# Altium PCB ICNE2521+ICL9101 EVM.PCBDOC
Units mm, origin at the board's own origin, x right, y up, seen from the top; angles counter-clockwise.
Board outline 181.66 x 131.8 mm, 2 copper layers (Top Layer, Bottom Layer); 46 components, 43 nets, 107 pads, 0 vias.
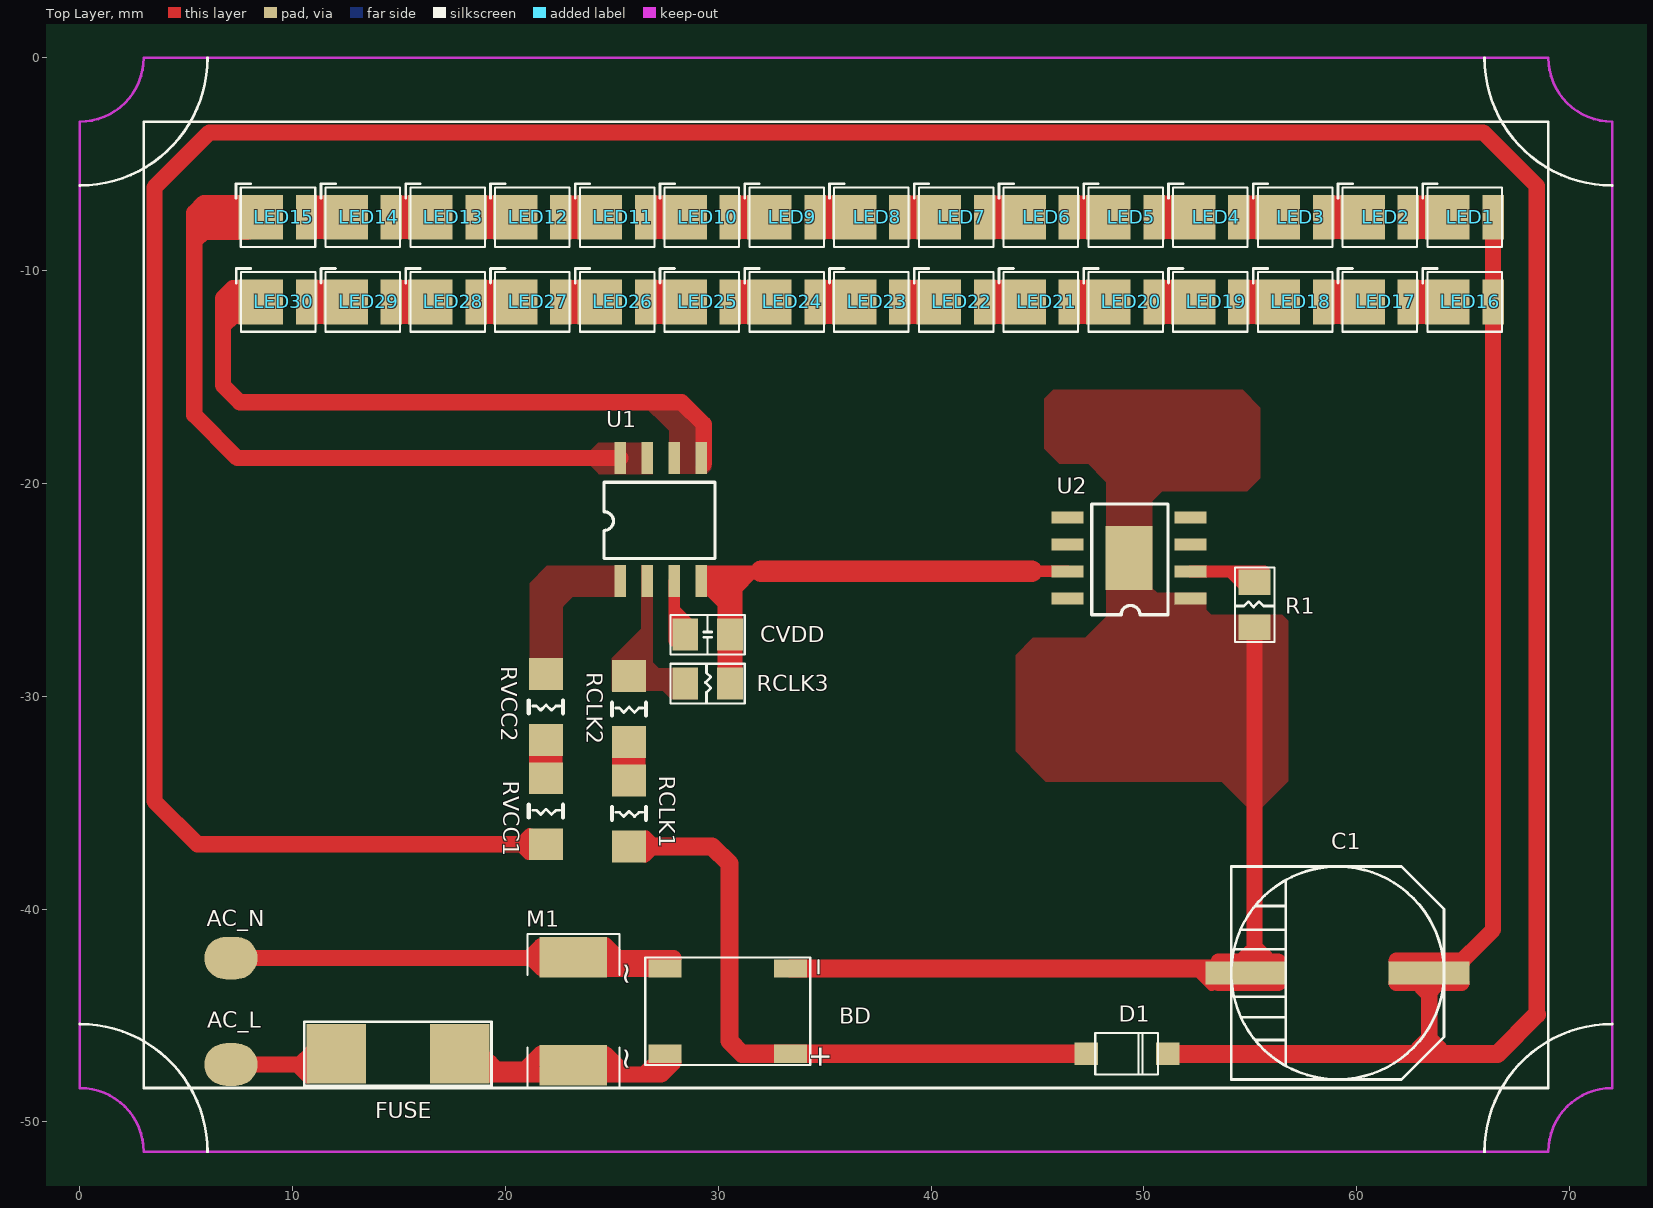
[diagram p0: Top Layer view]
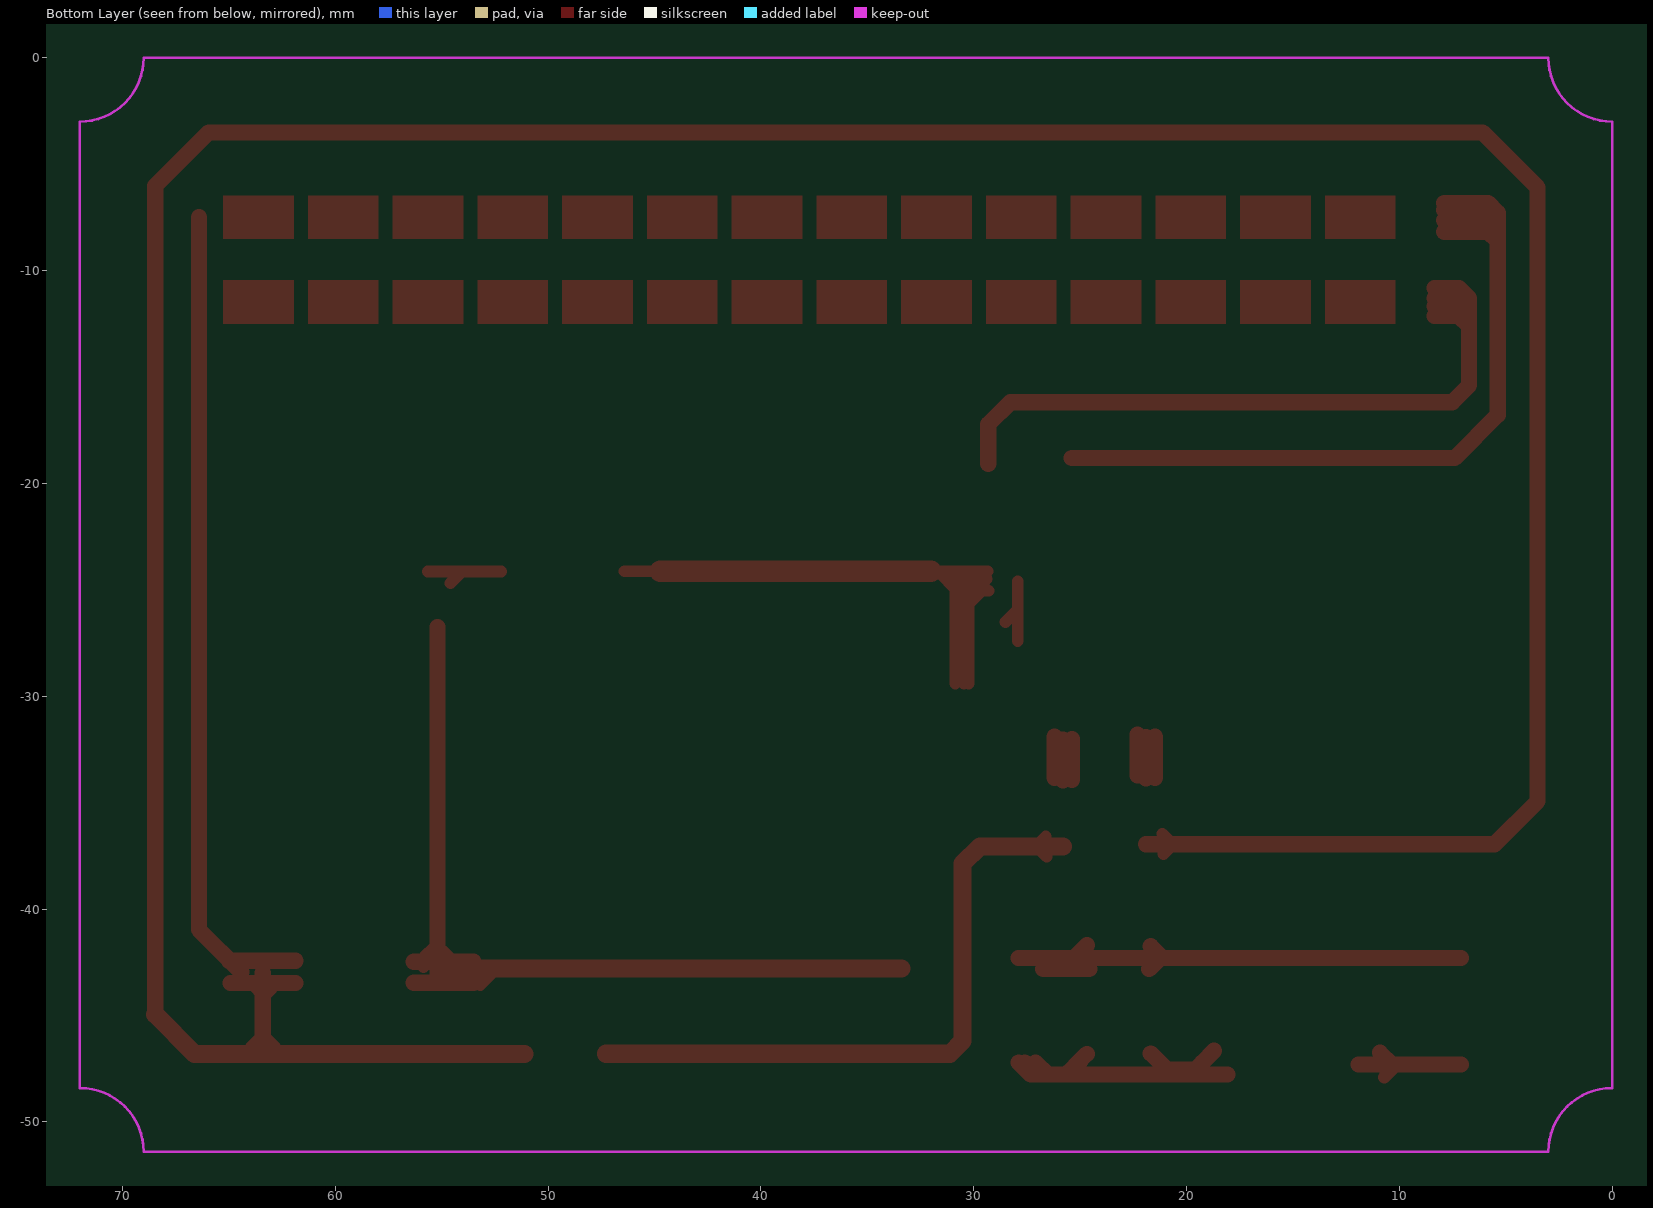
[diagram p1: Bottom Layer view, seen from below]

## Layer stack, top to bottom
Top Solder: solder mask 0.0102, Solder Resist, Dk 3.5
Top Layer: signal copper 0.0356
Dielectric1: dielectric 0.32, FR-4, Dk 4.8
Bottom Layer: signal copper 0.0356
Bottom Solder: solder mask 0.0102, Solder Resist, Dk 3.5

## Board outline
-38.678,19.684 138.792,19.684 138.792,-112.117 -42.869,-112.117 -42.869,19.684

## Design rules (kind name [scope] priority, off if disabled: settings)
Clearance [All] p1: gap=0.203
ComponentClearance [All] p1: gap=0.025 collisioncheckmode=3 verticalgap=0.254 showdistances=FALSE
FabricationTestPointUsage TestPointUsage [All] p1: valid=0 allowmultiple=FALSE
FabricationTestpoint Testpoint [All] p1: side=3 testpointundercomponent=TRUE minsize=1.016 maxsize=2.54 preferedsize=1.524 minholesize=0 maxholesize=1.016 preferedholesize=0.813 testpointgrid=0.025 allowsidetop=TRUE allowsidebottom=TRUE usegrid=TRUE gridtolerance=0
PlaneClearance [All] p1: clearance=0.102
PlaneConnect [All] p1: planeconnectstyle=Direct reliefexpansion=0.508 reliefentries=4 reliefconductorwidth=0.254 reliefairgap=0.254
PolygonConnect [All] p1: connectstyle=Direct reliefconductorwidth=0.254 reliefentries=4 polygonreliefangle="90 Angle" airgapwidth=0.254
RoutingVias [All] p1: holewidth=0.711 width=1.27 viastyle="Through Hole" minholewidth=0.711 minwidth=1.27 maxholewidth=0.711 maxwidth=1.27
SolderMaskExpansion [All] p1: expansion=0.102
Width [All] p1: maxlimit=25.4 minlimit=0.127 preferedwidth=1.524 toplayer_prefwidth=1 minimp=50.000000 maximp=50.000000 favimp=50.000000
25 further rules are at their usual default settings.

## Components (designator, comment, footprint, x,y, rotation, side; value= is the part's Value field where it differs from the comment)
AC_L "" "Test PAD 2" 7.1,-47.3 r180 top
AC_N "" "Test PAD 2" 7.1,-42.3 r0 top
BD "BD" BD-MDB10S 30.444,-44.796 r0 top
C1 "Cap Pol1" "10mmx10mm SMD CAP" 59.1,-43 r180 top
CVDD "Cap Semi" "C 0805" 29.5,-27.1 r180 top
D1 "Diode" SOD-123 49.2,-46.8 r180 top
FUSE "Fuse 2" "Fuse mf2410" 14.944,-46.796 r180 top
LED1 "" "2835 LED -everlight" 65.066,-7.489 r180 top
LED2 "" "2835 LED -everlight" 61.084,-7.489 r180 top
LED3 "" "2835 LED -everlight" 57.102,-7.489 r180 top
LED4 "" "2835 LED -everlight" 53.12,-7.489 r180 top
LED5 "" "2835 LED -everlight" 49.138,-7.489 r180 top
LED6 "" "2835 LED -everlight" 45.156,-7.489 r180 top
LED7 "" "2835 LED -everlight" 41.174,-7.489 r180 top
LED8 "" "2835 LED -everlight" 37.192,-7.489 r180 top
LED9 "" "2835 LED -everlight" 33.21,-7.489 r180 top
LED10 "" "2835 LED -everlight" 29.228,-7.489 r180 top
LED11 "" "2835 LED -everlight" 25.246,-7.489 r180 top
LED12 "" "2835 LED -everlight" 21.264,-7.489 r180 top
LED13 "" "2835 LED -everlight" 17.282,-7.489 r180 top
LED14 "" "2835 LED -everlight" 13.3,-7.489 r180 top
LED15 "" "2835 LED -everlight" 9.313,-7.489 r180 top
LED16 "" "2835 LED -everlight" 65.066,-11.471 r180 top
LED17 "" "2835 LED -everlight" 61.084,-11.471 r180 top
LED18 "" "2835 LED -everlight" 57.102,-11.471 r180 top
LED19 "" "2835 LED -everlight" 53.12,-11.471 r180 top
LED20 "" "2835 LED -everlight" 49.138,-11.471 r180 top
LED21 "" "2835 LED -everlight" 45.156,-11.471 r180 top
LED22 "" "2835 LED -everlight" 41.174,-11.471 r180 top
LED23 "" "2835 LED -everlight" 37.192,-11.471 r180 top
LED24 "" "2835 LED -everlight" 33.21,-11.471 r180 top
LED25 "" "2835 LED -everlight" 29.228,-11.471 r180 top
LED26 "" "2835 LED -everlight" 25.246,-11.471 r180 top
LED27 "" "2835 LED -everlight" 21.264,-11.471 r180 top
LED28 "" "2835 LED -everlight" 17.282,-11.471 r180 top
LED29 "" "2835 LED -everlight" 13.3,-11.471 r180 top
LED30 "" "2835 LED -everlight" 9.318,-11.471 r180 top
M1 "TVS" 1812-MOV1 23.194,-44.796 r90 top
R1 "Res Semi" "r 0805" 55.2,-25.7 r270 top
RCLK1 "Res Semi" "R 1206" 25.8,-35.5 r270 top
RCLK2 "Res Semi" "R 1206" 25.8,-30.6 r270 top
RCLK3 "Res Semi" "R 0805" 29.5,-29.4 r180 top
RVCC1 "Res Semi" "R 1206" 21.9,-35.4 r270 top
RVCC2 "Res Semi" "R 1206" 21.9,-30.5 r270 top
U1 "ICL9101" "SOP - 8L" 27.3,-21.7 r0 top
U2 "ICNE2521" SOP-8L-EP 49.3,-23.5 r270 top

## Footprints (in the part's own frame and the unit in brackets; to place one, negate y for a bottom-side part, rotate by r counter-clockwise, add the part's x,y. Pads: shape width x height; smd on the part's side, far side on the other; paste and mask are expansions set on the pad)
"10mmx10mm SMD CAP" [mm] "10mmx10mm SMD CAP"
  rect 3.8x1.1 smd: 1(-4.3,0) 2(4.3,0)
  silkscreen extent -5,-5 5,5
1812-MOV1 [mm] "1812-MOV1"
  rect 1.905x3.175 smd: 1(-2.54,0) 2(2.54,0)
  silkscreen extent -3.62,-2.16 3.62,2.16
"2835 LED -everlight" [mm] "2835 LED -everlight"
  rect 1x2.1 smd: 1(-1.34,0)
  rect 2.1x2.1 smd: 2(0.81,0)
  silkscreen extent -1.75,-1.57 1.97,1.4
BD-MDB10S [mm] "BD-MDB10S"
  rect 1.55x0.85 smd: 1(-2.95,2) 2(-2.95,-2) 3(2.95,-2) 4(2.95,2)
  silkscreen extent -3.88,-2.53 3.88,2.53
"C 0805" [mm] "0805"
  rect 1.2x1.5 smd: 1(-1.05,0) 2(1.05,0)
  silkscreen extent -1.74,-0.93 1.74,0.93
"Fuse mf2410" [mm] "Fuse mf2410"
  rect 2.8x2.8 smd: 1(-2.9,0) 2(2.9,0)
  silkscreen extent -4.4,-1.5 4.4,1.5
"r 0805" [mm] "0805"
  rect 1.2x1.5 smd: 1(-1.05,0) 2(1.05,0)
  silkscreen extent -1.74,-0.93 1.74,0.93
"R 0805" [mm] "0805"
  rect 1.2x1.5 smd: 1(-1.05,0) 2(1.05,0)
  silkscreen extent -1.74,-0.93 1.74,0.93
"R 1206" [mm] "1206"
  rect 1.5x1.6 smd: 1(-1.55,0) 2(1.55,0)
  silkscreen extent -0.3,-0.8 0.3,0.8
SOD-123 [mm] "SOD-123"
  rect 1.1x1.05 smd: 1(1.913,0) 2(-1.912,0)
  silkscreen extent -1.46,-0.98 1.49,0.98
"SOP - 8L" [mm] "SOP - 8L"
  round 1 on Top Overlay: 0(-3.2,-3.124)
  rect 0.55x1.5 smd: 1(-1.905,-2.892) 2(-0.635,-2.892) 3(0.635,-2.892) 4(1.905,-2.892) 5(1.905,2.892) 6(0.635,2.892) 7(-0.635,2.892) 8(-1.905,2.892)
  silkscreen extent -2.67,-1.83 2.54,1.76
SOP-8L-EP [mm] "SOP-8L-EP"
  round 1 on Top Overlay: 0(3.2,3.124)
  rect 0.55x1.5 smd: 1(1.905,2.892) 2(0.635,2.892) 3(-0.635,2.892) 4(-1.905,2.892) 5(-1.905,-2.892) 6(-0.635,-2.892) 7(0.635,-2.892) 8(1.905,-2.892)
  rect 3x2.2 smd: 9(0,0)
  silkscreen extent -2.54,-1.76 2.67,1.83
"Test PAD 2" [mm] "Test PAD 2"
  oval 2.5x2 smd: 1(0,0)

## Part data
AC_L AC_N: library part PIN111
BD: library part Bridge2, "Diode Bridge"

## Nets (pads, with @x,y where several pads share a name; then routed paths per layer and width w, separated by ;. In a path a pad name is that pad's centre, name@x,y a point inside that pad or via, vN(x,y) a via of type N, cw(c..) or ccw(c..) an arc to the next point about the centre after c; other vN are vias at no path point)
LEDA+: C1.1 D1.2 LED1.1 LED16.1 RVCC1.2 | length 227.5
  Top Layer w0.55: 20.596,-36.928 21.082,-37.414 ; 20.65,-36.95 RVCC1.2@21.136,-36.464 ; C1.1@62.713,-43.468 63.199,-43.954 ; 62.789,-46.507 63.275,-46.021 ; 63.4,-44.044 63.886,-43.558 ; 63.497,-46.021 63.983,-46.507
  Top Layer w0.762: RVCC1.2 5.53,-36.95 3.505,-34.925 3.505,-6.096 6.096,-3.505 65.938,-3.505 68.453,-6.02 68.453,-44.958 ; C1.1@61.869,-43.468 C1.1@64.685,-43.468 ; 61.869,-42.427 64.685,-42.427 ; C1.1@62.103,-43.468 C1.1@64.919,-43.468 ; 62.179,-42.427 64.995,-42.427 ; 63.4,-46.697 C1.1 ; C1.1@64.414,-42.951 66.406,-40.96 LED1.1
  Top Layer w0.85: D1.2 66.611,-46.8 68.453,-44.958
LEDA-: LED15.2 U1.7 U1.8 | length 41.2
  Top Layer w0.762: LED15.2@7.89,-8.169 5.833,-8.169 5.376,-8.626 ; LED15.2@7.89,-7.636 5.833,-7.636 5.376,-8.093 ; LED15.2@7.89,-7.153 5.833,-7.153 5.376,-7.61 ; LED15.2@7.89,-6.823 5.833,-6.823 5.376,-7.28 5.376,-7.61 ; U1.8 7.403,-18.808 5.376,-16.78 5.376,-8.626 ; 5.376,-8.626 5.376,-8.093 ; 5.376,-8.093 5.376,-7.61
LEDB-: LED30.2 U1.5 U1.6 | length 36.6
  Top Layer w0.762: LED30.2@8.348,-12.132 7.205,-12.132 6.722,-12.614 ; LED30.2@8.348,-11.674 7.205,-11.674 6.722,-12.157 ; LED30.2@8.348,-11.293 7.205,-11.293 6.722,-11.776 ; LED30.2@8.348,-10.811 7.205,-10.811 6.722,-11.293 6.722,-11.776 ; U1.5@29.312,-19.075 29.312,-17.221 28.27,-16.18 7.518,-16.18 6.722,-15.383 6.722,-12.614 ; 6.722,-12.614 6.722,-12.157 ; 6.722,-12.157 6.722,-11.776
NetAC_L_1: AC_L.1 FUSE.2 | length 12.8
  Top Layer w0.6: 10.151,-47.336 10.71,-47.895 10.151,-47.336
  Top Layer w0.762: AC_L.1 11.914,-47.3 AC_L.1 ; 10.354,-47.3 10.913,-46.741 10.354,-47.3
NetAC_N_1: AC_N.1 BD.1 M1.2 | length 26.3
  Top Layer w0.762: AC_N.1 27.899,-42.3 ; 21.124,-42.3 M1.2@21.683,-41.741 ; 21.2,-42.256 M1.2@21.759,-42.815 ; M1.2@24.575,-42.815 25.366,-42.815 ; M1.2@24.68,-42.815 25.239,-42.256 M1.2@24.68,-41.697 ; 25.157,-42.815 25.947,-42.815 BD.1@26.737,-42.815
NetBD_2: BD.2 FUSE.1 M1.1 | length 17.9
  Top Layer w0.762: FUSE.1@18.076,-47.768 27.321,-47.768 BD.2@27.88,-47.209 ; FUSE.1@18.711,-46.65 19.27,-47.209 19.828,-47.768 ; 19.546,-47.539 20.336,-47.539 21.127,-47.539 ; 20.735,-47.725 21.294,-47.166 ; 21.124,-47.336 M1.1@21.683,-46.777 ; M1.1@24.68,-46.803 25.239,-47.361 ; 24.973,-47.096 25.532,-47.655 ; 26.534,-47.768 BD.2@27.093,-47.209 ; 27.042,-47.768 BD.2@27.601,-47.209
NetBD_3: BD.3 D1.1 RCLK1.2 | length 31.8
  Top Layer w0.55: RCLK1.2@26.564,-37.536 27.05,-37.05 ; 26.618,-36.586 27.104,-37.072
  Top Layer w0.85: RCLK1.2 29.709,-37.05 30.522,-37.862 30.522,-46.193 31.125,-46.796 D1.1@47.284,-46.796
NetBD_4: BD.4 C1.2 R1.2 U2.1 U2.9 | length 47.2
  Top Layer w0.55: 52.498,-42.796 C1.2@52.984,-43.282 ; 52.705,-43.078 53.191,-43.564 ; 54.482,-42.421 54.968,-41.935 ; C1.2@54.613,-42.796 55.099,-42.31 ; 55.321,-41.755 55.807,-42.241 ; 55.369,-42.237 C1.2@55.855,-42.723
  Top Layer w0.762: C1.2@53.492,-43.459 C1.2@56.309,-43.459 ; C1.2@53.496,-42.469 C1.2@56.312,-42.469 ; C1.2@55.2,-42.996 R1.2
  Top Layer w0.85: BD.4 C1.2@54.613,-42.796
NetCVDD_1: CVDD.1 RCLK3.1 U1.4 U2.7 | length 42
  Top Layer w0.55: U1.4@29.286,-25.044 29.616,-25.044 ; U1.4@29.337,-24.13 29.489,-24.13 29.769,-24.13 ; U1.4@29.388,-24.486 30.124,-24.486 ; 29.489,-24.613 30.226,-24.613 ; 29.508,-24.936 29.616,-25.044 ; RCLK3.1@30.226,-29.4 RCLK3.1@30.226,-28.753 ; CVDD.1@30.226,-27.686 RCLK3.1@30.226,-28.753 ; 30.262,-25.69 30.226,-25.654 ; 30.353,-25.044 30.226,-25.044 ; RCLK3.1@30.455,-29.4 30.455,-24.613 ; 30.455,-24.486 30.353,-24.486 ; CVDD.1@30.531,-26.619 30.531,-25.552 ; 30.556,-24.613 30.455,-24.613 ; RCLK3.1@30.582,-28.804 CVDD.1@30.582,-27.737 ; 30.825,-24.979 30.861,-24.943 ; RCLK3.1@30.861,-29.4 30.861,-24.943 ; 31.579,-24.224 30.861,-24.943 ; 32.004,-24.13 30.404,-24.13 ; 44.729,-24.13 U2.7@46.403,-24.13 ; 29.616,-25.044 30.226,-25.044 ; 29.616,-25.044 30.226,-25.654 ; 29.769,-24.13 29.997,-24.13 ; 29.769,-24.13 30.124,-24.486 ; 29.997,-24.13 30.404,-24.13 ; 29.997,-24.13 30.353,-24.486 ; 30.124,-24.486 30.226,-24.587 30.226,-24.613 ; 30.124,-24.486 30.353,-24.486 ; RCLK3.1@30.226,-28.753 30.226,-25.654 ; 30.226,-25.654 30.226,-25.044 ; 30.226,-25.044 30.226,-24.613 ; 30.226,-24.613 30.455,-24.613 ; 30.353,-24.486 30.455,-24.587 30.455,-24.613 ; 30.404,-24.13 30.861,-24.587 30.861,-24.943
  Top Layer w1: 32.004,-24.13 44.729,-24.13
NetCVDD_2: CVDD.2 U1.3 | length 3.5
  Top Layer w0.55: CVDD.2@27.935,-27.402 U1.3 ; 28.016,-26.018 CVDD.2@28.502,-26.504
NetLED1_2: LED1.2 LED2.1
NetLED2_2: LED2.2 LED3.1
NetLED3_2: LED3.2 LED4.1
NetLED4_2: LED4.2 LED5.1
NetLED5_2: LED5.2 LED6.1
NetLED6_2: LED6.2 LED7.1
NetLED7_2: LED7.2 LED8.1
NetLED8_2: LED8.2 LED9.1
NetLED9_2: LED9.2 LED10.1
NetLED10_2: LED10.2 LED11.1
NetLED11_2: LED11.2 LED12.1
NetLED12_2: LED12.2 LED13.1
NetLED13_2: LED13.2 LED14.1
NetLED14_2: LED14.2 LED15.1
NetLED16_2: LED16.2 LED17.1
NetLED17_2: LED17.2 LED18.1
NetLED18_2: LED18.2 LED19.1
NetLED19_2: LED19.2 LED20.1
NetLED20_2: LED20.2 LED21.1
NetLED21_2: LED21.2 LED22.1
NetLED22_2: LED22.2 LED23.1
NetLED23_2: LED23.2 LED24.1
NetLED24_2: LED24.2 LED25.1
NetLED25_2: LED25.2 LED26.1
NetLED26_2: LED26.2 LED27.1
NetLED27_2: LED27.2 LED28.1
NetLED28_2: LED28.2 LED29.1
NetLED29_2: LED29.2 LED30.1
NetR1_1: R1.1 U2.2 | length 4.2
  Top Layer w0.55: U2.2 R1.1@55.656,-24.135 ; 54.099,-24.203 R1.1@54.585,-24.689
NetRCLK1_1: RCLK1.1 RCLK2.2 | length 5.8
  Top Layer w0.762: RCLK1.1@25.385,-33.925 RCLK2.2@25.385,-32.003 ; RCLK1.1 RCLK2.2@25.8,-32.028 ; RCLK1.1@26.198,-33.823 RCLK2.2@26.198,-31.901
NetRCLK2_1: RCLK2.1 RCLK3.2 U1.2
NetRVCC1_1: RVCC1.1 RVCC2.2 | length 5.8
  Top Layer w0.762: RVCC1.1@21.485,-33.825 RVCC2.2@21.485,-31.903 ; RVCC1.1 RVCC2.2@21.9,-31.928 ; RVCC1.1@22.298,-33.723 RVCC2.2@22.298,-31.801
NetRVCC2_1: RVCC2.1 U1.1
pads on no net: U1.0 U2.0 U2.3 U2.4 U2.5 U2.6 U2.8

## Polygon pours and split planes (outlines as drawn)
NetBD_4 on Top Layer "Top Layer-NetBD_4" (solid, pour order 8): 48.235,-21.844 48.235,-26.264 47.625,-26.873 47.244,-27.254 44.78,-27.254 43.967,-28.067 43.967,-32.588 45.39,-34.011 53.645,-34.011 55.016,-35.382 55.2,-35.566 56.019,-34.747 56.781,-33.985 56.781,-26.441 56.577,-26.238 56.501,-26.162 53.162,-26.162 52.934,-25.933 52.934,-25.146 50.622,-25.146 50.394,-24.917 50.394,-20.828 50.851,-20.371 54.864,-20.371 55.474,-19.761 55.474,-16.434 54.635,-15.596 45.745,-15.596 45.314,-16.027 45.314,-18.364 46.025,-19.075 47.371,-19.075 48.133,-19.837 48.235,-19.939
NetRVCC2_1 on Top Layer "Top Layer-NetRVCC2_1" (solid, pour order 6): 21.133,-29.667 21.133,-24.689 21.946,-23.876 25.654,-23.876 25.654,-25.324 23.165,-25.324 22.86,-25.629 22.733,-25.756 22.682,-25.806 22.682,-29.667
LEDA- on Top Layer "Top Layer-LEDA-" (solid, pour order 4): 26.924,-18.085 24.359,-18.085 23.635,-18.808 24.309,-19.482 24.333,-19.506 24.36,-19.533 24.384,-19.557 26.924,-19.557
LEDB- on Top Layer "Top Layer-LEDB-" (solid, pour order 2): 27.686,-19.533 29.464,-19.533 29.667,-19.329 29.667,-17.501 28.346,-16.18 26.34,-16.18 27.661,-17.501 27.686,-17.526
NetRCLK2_1 on Top Layer "Top Layer-NetRCLK2_1" (solid, pour order 0): 24.994,-29.743 24.994,-28.219 26.365,-26.848 26.391,-26.822 26.391,-23.851 26.924,-23.851 26.924,-28.397 27.203,-28.677 29.032,-28.677 29.032,-30.15 27.788,-30.15 27.407,-29.769 27.381,-29.743

## Keep-outs
Keep-Out Layer:
  lines w0.127: 69,0 ccw(c72,0) 72,-3 72,-48.4 ; 69,0 3,0 cw(c0,0) 0,-3 0,-48.4 cw(c0,-51.4) 3,-51.4 69,-51.4 cw(c72,-51.4) 72,-48.4

## Other copper
Top Layer:
  rectangle net NetLED29_2: 10.176,-12.507 13.504,-10.449
  rectangle net NetLED28_2: 14.158,-12.507 17.486,-10.449
  rectangle net NetLED27_2: 18.14,-12.507 21.468,-10.449
  rectangle net NetLED26_2: 22.122,-12.507 25.45,-10.449
  rectangle net NetLED25_2: 26.104,-12.507 29.432,-10.449
  rectangle net NetLED24_2: 30.086,-12.507 33.414,-10.449
  rectangle net NetLED23_2: 34.068,-12.507 37.396,-10.449
  rectangle net NetLED22_2: 38.05,-12.507 41.378,-10.449
  rectangle net NetLED21_2: 42.032,-12.507 45.36,-10.449
  rectangle net NetLED20_2: 46.014,-12.507 49.342,-10.449
  rectangle net NetLED19_2: 49.996,-12.507 53.324,-10.449
  rectangle net NetLED18_2: 53.978,-12.507 57.306,-10.449
  rectangle net NetLED17_2: 57.96,-12.507 61.288,-10.449
  rectangle net NetLED16_2: 61.942,-12.507 65.27,-10.449
  rectangle net NetLED1_2: 61.942,-8.525 65.27,-6.467
  rectangle net NetLED2_2: 57.96,-8.525 61.288,-6.467
  rectangle net NetLED3_2: 53.978,-8.525 57.306,-6.467
  rectangle net NetLED4_2: 49.996,-8.525 53.324,-6.467
  rectangle net NetLED5_2: 46.014,-8.525 49.342,-6.467
  rectangle net NetLED6_2: 42.032,-8.525 45.36,-6.467
  rectangle net NetLED7_2: 38.05,-8.525 41.378,-6.467
  rectangle net NetLED8_2: 34.068,-8.525 37.396,-6.467
  rectangle net NetLED9_2: 30.086,-8.525 33.414,-6.467
  rectangle net NetLED10_2: 26.104,-8.525 29.432,-6.467
  rectangle net NetLED11_2: 22.122,-8.525 25.45,-6.467
  rectangle net NetLED12_2: 18.14,-8.525 21.468,-6.467
  rectangle net NetLED13_2: 14.158,-8.525 17.486,-6.467
  rectangle net NetLED14_2: 10.176,-8.525 13.504,-6.467

## Silkscreen, mask and mechanical layers (free items; w line width, h text height)
Top Overlay:
  lines w0.127: 0,-45.4 cw(c0,-51.4) 6,-51.4 ; 0,-6 ccw(c0,0) 6,0 ; 66,-51.4 cw(c72,-51.4) 72,-45.4 ; 66,0 ccw(c72,0) 72,-6 ; 69,-48.4 69,-3 ; 69,-48.4 3,-48.4 3,-3 69,-3

## Text inside footprints (layer, text, board x,y; h text height)
BD: Top Overlay "~" at 25.264,-46.461 h1 r270; Top Overlay "~" at 25.264,-42.461 h1 r270; Top Overlay "_" at 35.004,-42.371 h1 r270; Top Overlay "+" at 34.364,-46.371 h1 r270